# EAGLE board SenseGrain-v0.1 (EAGLE 7.2.0)
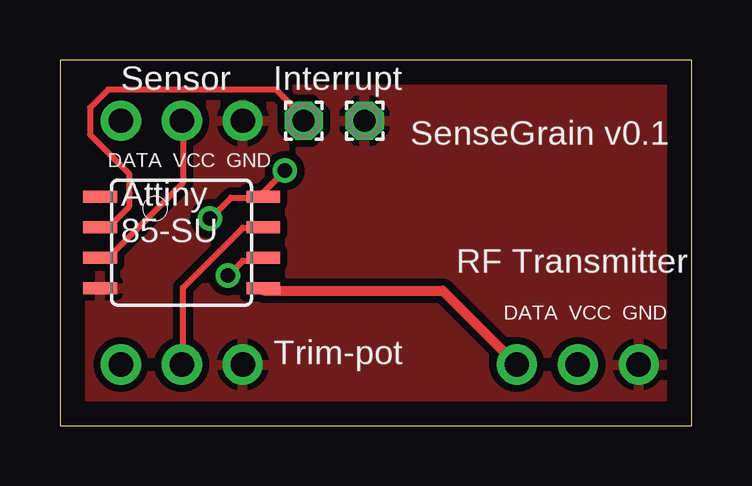
[diagram p0: board, top side]
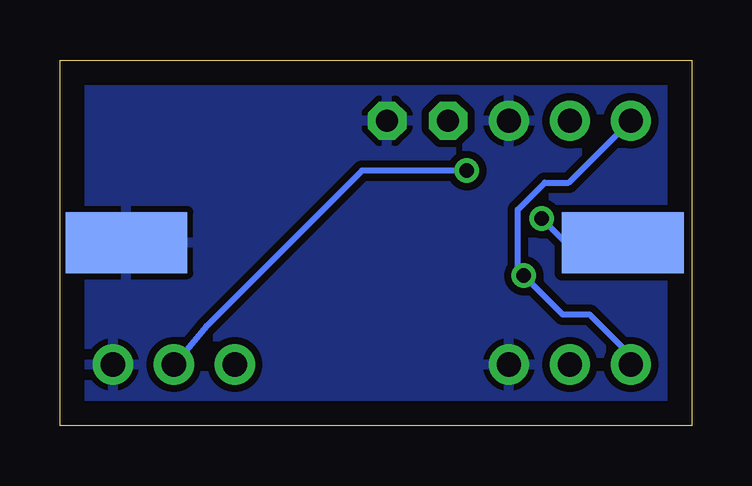
[diagram p1: board, bottom side, seen from below]

Size 26.34 x 15.23 mm. Coordinates in mm from the lower left corner, seen from the top.
Outline: 0,0 26.34,0 26.34,15.23 0,15.23 0,0
Copper layers (1*16): Top 0.035mm / dielectric 1.5mm / Bottom 0.035mm
Design rules "default": minimum track width 10mil, minimum drill 24mil, track to track 8mil, track to pad 8mil, pad to pad 8mil, via to via 8mil, smd to smd 8mil, copper to edge 40mil, drill to drill 8mil, minimum pad ring 10mil, minimum via ring 8mil, stop-mask expansion 4mil, vias tented up to drill 0mil, thermal gap 10mil
Net classes: 0 default: width 0.254 mm, drill 0.508 mm, clearance 0.305 mm

## Footprints (pad centres in the part's own frame; a part is rotated, then mirrored left to right if it is on the bottom)
1X03-CLEANBIG = drill 1.016 pad 1.676: 1 -2.54,0; 2 0,0; 3 2.54,0
SMD2,54-5,08 = smd 2.54 x 5.08: 1 0,0
8S2 = smd 0.5 x 1.4: 1 -1.905,-3.404; 2 -0.645,-3.404; 3 0.625,-3.404; 4 1.895,-3.404; 5 1.905,3.404; 6 0.635,3.404; 7 -0.635,3.404; 8 -1.905,3.404
1,6/0,9 = drill 0.914 pad 1.6 octagon: 1 0,0

## Placement (x,y rotation side)
ANTENNA  [1X03-CLEANBIG]  21.59,2.54 180 top
GNDPAD  WIREPADSMD2,54-5,08  [SMD2,54-5,08]  23.57,7.62 270 bottom
IC1  TINY13V-10SU  [8S2]  5.08,7.62 270 top
PAD3  [1,6/0,9]  10.16,12.7 0 top
PAD4  [1,6/0,9]  12.7,12.7 0 top
SENSOR  [1X03-CLEANBIG]  5.08,12.7 0 top
SETPOT  [1X03-CLEANBIG]  5.08,2.54 0 top
VCCPAD  WIREPADSMD2,54-5,08  [SMD2,54-5,08]  2.87,7.62 270 bottom

## Library data of the parts
ANTENNA SENSOR SETPOT = adafruit
GNDPAD PAD3 PAD4 VCCPAD = wirepad
IC1 = atmel; MPN: ATTINY13V-10SU; OC_FARNELL: 9171584; OC_NEWARK: 96K6524

## Nets
GND: ANTENNA.1 GNDPAD.1 IC1.4 PAD4.1 SENSOR.3 SETPOT.3
N$1: IC1.6 SENSOR.1 SETPOT.1
N$2: ANTENNA.3 IC1.5
N$4: IC1.3 SENSOR.2
N$5: IC1.7 SETPOT.2
N$6: IC1.2 PAD3.1
VCC: ANTENNA.2 IC1.8 VCCPAD.1

## Tracks (layer width: path | path; a pad name or v marks a point on that pad's centre or on a via)
GND
  pour Top: 0,15.24 0,0 26.67,0 26.67,15.24
  pour Bottom: 0,15.24 0,0 26.67,0 26.67,15.24
N$1  (via drill 0.61)
  Top 0.254: v7,6.25 7.62,6.88 8.38,6.88 IC1.6
  Bottom 0.254: SETPOT.1 2.62,2.62 2.62,3 4.25,4.62 5.38,4.62 v7,6.25 7,6.38 7.25,6.62 7.25,9 6.12,10.12 5.12,10.12 2.62,12.62 SENSOR.1
N$2
  Top 0.254: 8.5,5.62 IC1.5
  Top 0.406: 8.5,5.62 15.96,5.62 ANTENNA.3
N$4
  Top 0.254: IC1.3 1.75,7 2,7 5.12,10.12 5.12,12.62 SENSOR.2
N$5
  Top 0.254: IC1.7 8.38,8.25 7.62,8.25 5.12,5.75 5.12,2.62 SETPOT.2
N$6
  Top 0.254: IC1.2 1.75,8.38 2.12,8.38 2.88,9.12 2.88,10.5 1.25,12.12 1.25,13.25 2,14 9,14 10.25,12.75 PAD3.1
VCC  (via drill 0.61)
  Top 0.254: v6.25,8.62 7.12,9.5 8.38,9.5 IC1.8 8.38,9.62 v9.38,10.62
  Bottom 0.254: v6.25,8.62 5.25,7.62 VCCPAD.1 | v9.38,10.62 13.75,10.62 20.23,4.14 21.5,2.62 ANTENNA.2

## Text on the board
tNames: Sensor | Interrupt | SenseGrain v0.1 | DATA VCC GND | Attiny / 85-SU | RF Transmitter | DATA VCC GND | Trim-pot